# EAGLE board Motor Driver Schematic v17 (EAGLE 9.7.0)
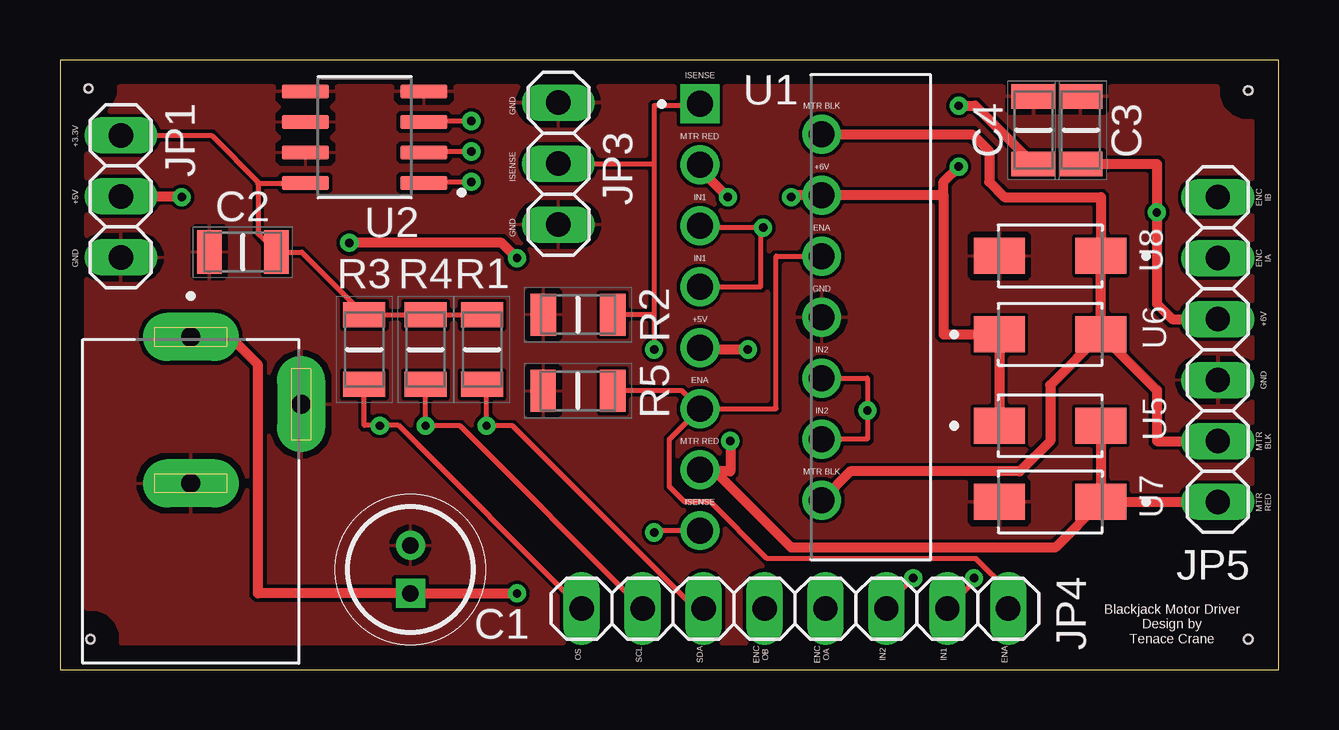
[diagram p0: board, top side]
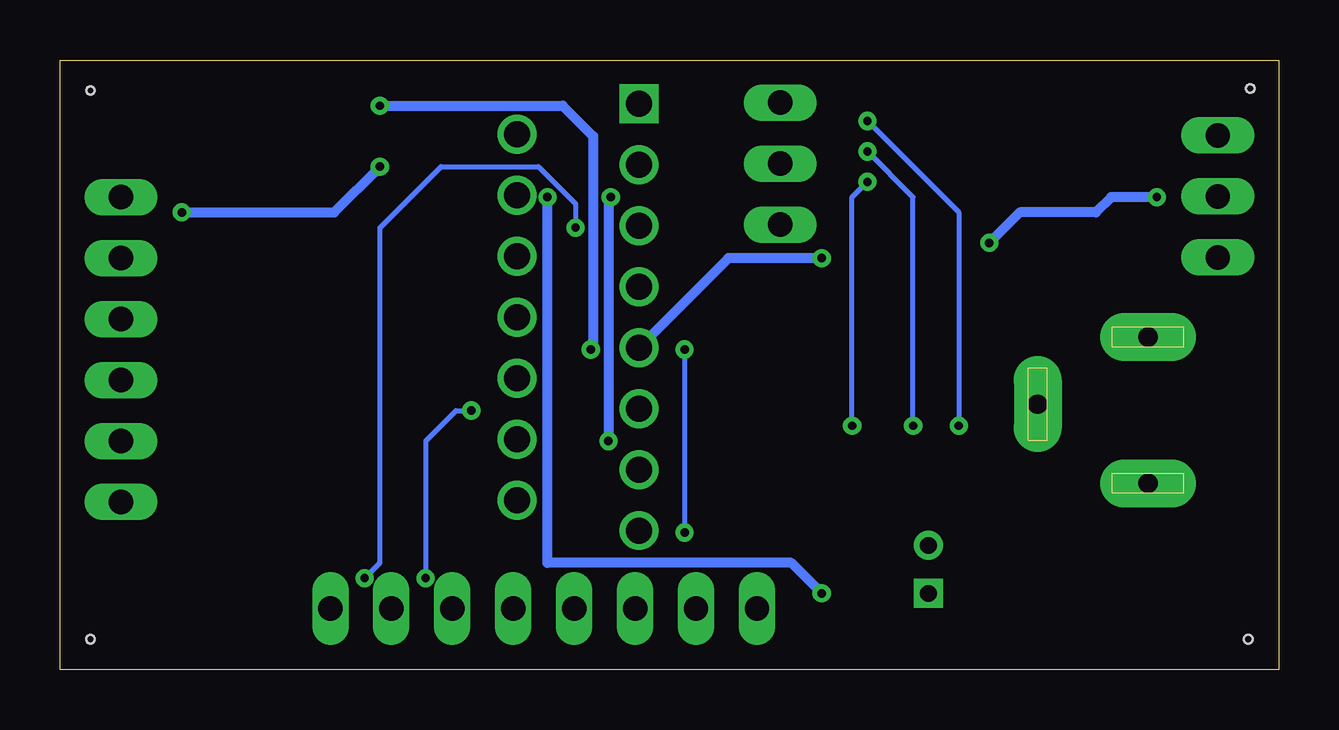
[diagram p1: board, bottom side, seen from below]

Size 50.8 x 25.4 mm. Coordinates in mm from the lower left corner, seen from the top.
Outline: 0,0 50.8,0 50.8,25.4 0,25.4 0,0
Copper layers (1*16): Top / Bottom
Stack-up Default Layer Stack: Top User Defined 0.035mm / Dielectric-1 User Defined 1.5mm / Bottom User Defined 0.035mm
Design rules: minimum drill size 0.35mm, minimum copper width 6mil, keepout clearance 0mil, drill distance 6mil, dimension clearance 40mil, restrict clearance 0mil, copper clearance wire_polygon to wire_polygon 6mil, copper clearance wire_polygon to pad_smd 6mil, copper clearance wire_polygon to via 6mil, copper clearance pad_smd to pad_smd 6mil, copper clearance pad_smd to via 6mil, copper clearance via to via 6mil, copper clearance smd to pad (same net) 6mil, copper clearance smd to via (same net) 6mil, copper clearance smd to smd (same net) 6mil
Holes 0.35 mm at 1.19,24.21 49.53,24.13 49.53,1.27 1.27,1.27

## Footprints (pad centres in the part's own frame; a part is rotated, then mirrored left to right if it is on the bottom)
CAPPRD200W50D525H1250 = drill 0.7 pad 1.1 square: 1 0,0 | drill 0.7 pad 1.1: 2 2,0
CAPC3216X110N = smd 1.02 x 1.82: 1 -1.4,0; 2 1.4,0
GRAVITECH_CON-SOCJ-2155 = drill 0.8 pad 2 long: 1 6.1,0; 2 3.3,-4.6; 3 0,0
1X03 = drill 1.016 long: 1 -2.54,0; 2 0,0; 3 2.54,0
1X08 = drill 1.016 long: 1 -8.89,0; 2 -6.35,0; 3 -3.81,0; 4 -1.27,0; 5 1.27,0; 6 3.81,0; 7 6.35,0; 8 8.89,0
1X06 = drill 1.016 long: 1 -6.35,0; 2 -3.81,0; 3 -1.27,0; 4 1.27,0; 5 3.81,0; 6 6.35,0
RESC3116X65N = smd 1.05 x 1.75: 1 -1.45,0; 2 1.45,0
TO127P2020X500X2100-15 = drill 1.08 pad 1.62 square: 1 0,0 | drill 1.08 pad 1.62: 2 5.08,-1.27; 3 0,-2.54; 4 5.08,-3.81; 5 0,-5.08; 6 5.08,-6.35; 7 0,-7.62; 8 5.08,-8.89; 9 0,-10.16; 10 5.08,-11.43; 11 0,-12.7; 12 5.08,-13.97; 13 0,-15.24; 14 5.08,-16.51; 15 0,-17.78
SOIC127P599X175-8N = smd 1.97 x 0.6: 1 -2.47,1.905; 2 -2.47,0.635; 3 -2.47,-0.635; 4 -2.47,-1.905; 5 2.47,-1.905; 6 2.47,-0.635; 7 2.47,0.635; 8 2.47,1.905
DIOM4325X250N = smd 2.12 x 1.5: A 2.115,0; C -2.115,0

## Placement (x,y rotation side)
C1  Polarized 1uF  [CAPPRD200W50D525H1250]  14.61,3.17 90 top
C2  100nF  [CAPC3216X110N]  7.62,17.39 180 top
C3  100nF  [CAPC3216X110N]  42.55,22.47 90 top
C4  100nF  [CAPC3216X110N]  40.57,22.47 90 top
J4  CON-SOCJ-2155  [GRAVITECH_CON-SOCJ-2155]  5.45,7.76 90 top
JP1  PINHD-1X3  [1X03]  2.54,19.72 270 top
JP3  PINHD-1X3  [1X03]  20.77,21.08 270 top
JP4  PINHD-1X8  [1X08]  30.64,2.54 180 top
JP5  PINHD-1X6  [1X06]  48.26,13.34 90 top
R1  RC1206JR-0710KL  [RESC3116X65N]  17.6,13.34 90 top
R2  RL1206FR-070R04L  [RESC3116X65N]  21.59,14.79 0 top
R3  RC1206JR-0710KL  [RESC3116X65N]  12.69,13.34 90 top
R4  RC1206JR-0710KL  [RESC3116X65N]  15.24,13.34 90 top
R5  RC1206JR-0710KL  [RESC3116X65N]  21.59,11.61 180 top
U1  L298N  [TO127P2020X500X2100-15]  26.67,23.57 0 top
U2  LM75AIMX/NOPB  [SOIC127P599X175-8N]  12.7,22.18 180 top
U5  RS2AA_R3G  [DIOM4325X250N]  41.27,10.16 0 top
U6  RS2AA_R3G  [DIOM4325X250N]  41.27,13.97 0 top
U7  RS2AA_R3G  [DIOM4325X250N]  41.27,6.99 180 top
U8  RS2AA_R3G  [DIOM4325X250N]  41.27,17.23 180 top

## Library data of the parts
C1 = REA010M2CBK-0511P; DESCRIPTION: Aluminum Electrolytic Capacitors - Radial Leaded 160V 1.0uF 20% 5x11mm; HEIGHT: 12.5mm; MANUFACTURER_NAME: Lelon; MANUFACTURER_PART_NUMBER: REA010M2CBK-0511P; MOUSER_PART_NUMBER: 140-REA1R0M2CBK0511P; MOUSER_PRICE-STOCK: https://www.mouser.co.uk/ProductDetail/Lelon/REA010M2CBK-0511P?qs=tsfqLUzc7IoVZpITlkTcwQ%3D%3D
C2-C4 = C1206C104K5RAC7867; DESCRIPTION: Multilayer Ceramic Capacitors MLCC - SMD/SMT 50V 0.1uF X7R 1206 10%; HEIGHT: 1.1mm; MANUFACTURER_NAME: KEMET; MANUFACTURER_PART_NUMBER: C1206C104K5RAC7867; MOUSER_PART_NUMBER: 80-C1206104K5RAC7867; MOUSER_PRICE-STOCK: https://www.mouser.co.uk/ProductDetail/KEMET/C1206C104K5RAC7867?qs=r%2FVmNO8Tjq5MvP%2FjoJQjcw%3D%3D
J4 = CON-SOCJ-2155; AVAILABILITY: In Stock; CHECK_PRICES: https://www.snapeda.com/parts/CON-SOCJ-2155/Gravitech/view-part/?ref=eda; DESCRIPTION: DC Power Connectors Power Jack/Connector 2.1mm x 5.5mm; MF: Gravitech; MP: CON-SOCJ-2155; PACKAGE: None; PRICE: None; SNAPEDA_LINK: https://www.snapeda.com/parts/CON-SOCJ-2155/Gravitech/view-part/?ref=snap
JP1 JP3 JP4 = pinhead
JP5 = Connector; CATEGORY: Headers; DESCRIPTION: Header, Straight, 6 Position; MANUFACTURER: Generic; MPN: Generic; OPERATING_TEMPERATURE: Generic; PART_STATUS: Active; PITCH: 0.100" (2.54mm); ROHS_COMPLIANCE: Generic; SERIES: Generic; SUB-CATEGORY: Headers, Male Pins; TYPE: Board to Board or Cable, Unshrouded, Through Hole, Straight
R1 R3-R5 = RC1206JR-0710KL; DESCRIPTION: Resistor Thick film 1206 5% 10K; HEIGHT: 0.65mm; MANUFACTURER_NAME: YAGEO; MANUFACTURER_PART_NUMBER: RC1206JR-0710KL; MOUSER_PART_NUMBER: 603-RC1206JR-0710KL; MOUSER_PRICE-STOCK: https://www.mouser.co.uk/ProductDetail/YAGEO/RC1206JR-0710KL?qs=afJZr%2F7kGG7jis1hiCdUVA%3D%3D
R2 = RL1206FR-070R04L; DESCRIPTION: Current Sense Resistors - SMD 40 mOhms 250mWat 1 % 1200 ppm/C; HEIGHT: 0.65mm; MANUFACTURER_NAME: YAGEO; MANUFACTURER_PART_NUMBER: RL1206FR-070R04L; MOUSER_PART_NUMBER: 603-RL1206FR-070R04L; MOUSER_PRICE-STOCK: https://www.mouser.co.uk/ProductDetail/YAGEO/RL1206FR-070R04L?qs=AfGmtpoX2gi524idhplquw%3D%3D
U1 = L298N; MANUFACTURER: STMicroelectronics; MAXIMUM_PACKAGE_HEIGHT: 5.0mm; STANDARD: IPC-7351B
U2 = LM75AIMX_NOPB
U5-U8 = RS2AA_R3G; MANUFACTURER: Taiwan Semiconductor; MAXIMUM_PACKAGE_HEIGHT: 2.5 mm; PARTREV: L2102; STANDARD: IPC-7351B

## Nets
+3.3V: C2.1 JP1.1 R1.2 R3.2 R4.2 U2.8
+5V: C4.1 JP1.2 U1.9
+6V: C1.1 C3.1 J4.1 JP5.4 U1.4 U5.C U6.C
AGND: C1.2 C2.2 C3.2 C4.2 J4.2 J4.3 JP1.3 JP3.1 JP3.3 JP5.3 R2.1 R5.2 U1.8 U2.4 U2.5 U2.6 U2.7 U7.A U8.A
ENA: JP4.1 R5.1 U1.6 U1.11
ENC_IA: JP5.5
ENC_IB: JP5.6
ENC_OA: JP4.4
ENC_OB: JP4.5
I_SENSE: JP3.2 R2.2 U1.1 U1.15
IN1: JP4.2 U1.5 U1.7
IN2: JP4.3 U1.10 U1.12
MTR_BLK: JP5.2 U1.2 U1.14 U6.A U8.C
MTR_RED: JP5.1 U1.3 U1.13 U5.A U7.C
OS: JP4.8 R3.1 U2.3
SCL: JP4.7 R4.1 U2.2
SDA: JP4.6 R1.1 U2.1

## Tracks (layer width: path | path; a pad name or v marks a point on that pad's centre or on a via)
+3.3V
  Top 0.203: JP1.1 6.32,22.26 8.3,20.27 | 8.3,20.27 U2.8 | 8.3,20.27 8.26,20.23 8.26,18.16 C2.1 10.08,17.39 R3.2 R4.2 R1.2
+5V  (via drill 0.35)
  Top 0.203: 26.75,13.34 U1.9 | 5.08,19.72 v5.08,19.68
  Top 0.406: v37.47,23.5 38.15,23.5 C4.1 | JP1.2 5.08,19.72 | v12.06,17.78 18.41,17.78 v19.05,17.14 | v28.67,13.34 26.75,13.34
  Bottom 0.406: v37.47,23.5 29.84,23.5 28.57,22.23 28.57,13.43 v28.67,13.34 | v5.08,19.68 6.99,19.68 7.62,19.05 10.79,19.05 v12.06,17.78 | v19.05,17.14 22.94,17.14 U1.9
+6V  (via drill 0.35)
  Top 0.406: U5.C U6.C 36.83,13.97 36.83,19.76 | 36.83,19.76 U1.4 30.56,19.76 v30.48,19.68 | 36.83,19.76 36.83,20.32 v37.47,20.95 | JP5.4 46.35,14.61 45.72,15.24 v45.72,19.05 45.72,21.07 C3.1 | J4.1 7.1,13.86 8.26,12.7 8.26,3.17 C1.1 v19.05,3.17
  Bottom 0.406: v45.72,19.05 39.37,19.05 v37.47,20.95 | v30.48,19.68 30.48,4.45 20.32,4.45 v19.05,3.17
AGND
  pour Top: -1.91,26.67 -1.91,-3.17 53.34,-3.17 53.34,26.67 53.98,26.67
ENA
  Top 0.203: R5.1 25.93,11.61 U1.11 | U1.11 29.84,10.87 29.84,17.22 U1.6 | U1.11 25.4,9.6 25.4,7.62 26.04,6.99 27.11,6.99 29.47,4.62 38.18,4.62 39.53,3.28 JP4.1
I_SENSE  (via drill 0.35)
  Top 0.203: 24.77,14.79 R2.2 | 24.77,21.08 24.77,14.79 | JP3.2 24.77,21.08 | U1.1 26.67,23.5 24.77,23.5 24.77,21.08 | 24.77,14.79 v24.77,13.34 | v24.77,5.71 24.77,5.79 U1.15
  Bottom 0.203: v24.77,13.34 v24.77,5.71
IN1  (via drill 0.35)
  Top 0.203: JP4.2 38.1,3.65 v38.1,3.81 | 29.21,18.41 29.21,15.95 U1.7 | v29.31,18.41 29.21,18.41 | 29.21,18.41 26.75,18.41 U1.5
  Bottom 0.203: v38.1,3.81 37.47,4.45 37.47,18.41 34.92,20.95 30.86,20.95 29.31,19.41 v29.31,18.41
IN2  (via drill 0.35)
  Top 0.203: JP4.3 34.45,2.7 v35.56,3.81 | U1.10 33.66,12.14 v33.66,10.79 33.66,9.6 U1.12
  Bottom 0.203: v35.56,3.81 35.56,9.53 34.29,10.79 v33.66,10.79
MTR_BLK
  Top 0.406: U6.A U8.C 43.39,19.68 39.37,19.68 38.73,20.32 38.73,21.59 38.02,22.3 U1.2 | U6.A 45.72,11.64 45.72,9.53 JP5.2 | U6.A 41.27,11.86 41.27,9.53 40.01,8.26 32.94,8.26 U1.14
MTR_RED  (via drill 0.35)
  Top 0.406: U5.A U7.C | U7.C JP5.1 | U7.C 41.48,5.08 30.48,5.08 27.3,8.26 | v27.94,9.53 27.94,8.26 27.3,8.26 | 27.3,8.26 26.75,8.26 U1.13 | v27.84,19.68 26.67,20.86 U1.3
  Bottom 0.406: v27.94,9.53 27.94,19.59 v27.84,19.68
OS  (via drill 0.35)
  Top 0.203: U2.3 15.22,22.86 v17.14,22.86 | JP4.8 14.11,10.17 13.32,10.17 | 13.32,10.17 12.69,10.17 R3.1 | 13.32,10.17 v13.34,10.16
  Bottom 0.203: v17.14,22.86 13.34,19.05 v13.34,10.16
SCL  (via drill 0.35)
  Top 0.203: U2.2 15.22,21.59 v17.14,21.59 | JP4.7 16.67,10.16 v15.24,10.16 R4.1
  Bottom 0.203: v17.14,21.59 15.24,19.68 v15.24,10.16
SDA  (via drill 0.35)
  Top 0.203: R1.1 17.78,11.7 v17.78,10.16 18.87,10.16 26.49,2.54 JP4.6 | U2.1 15.22,20.32 v17.14,20.32
  Bottom 0.203: v17.78,10.16 17.78,19.68 v17.14,20.32

## Text on the board
SilkscreenTop: ISENSE | GND | MTR BLK | +3.3V | MTR RED | ISENSE | +6V | +5V | IN1 | ENC / IB | GND | ENA | GND | IN1 | ENC / IA | GND | +5V | +6V | IN2 | ENA | GND | IN2 | MTR RED | MTR / BLK | MTR BLK | ISENSE | MTR / RED | Blackjack Motor Driver / Design by / Tenace Crane | OS | SCL | SDA | ENC / OB | ENC / OA | IN2 | IN1 | ENA